# EAGLE board FED_detector_motor (EAGLE 5.11)
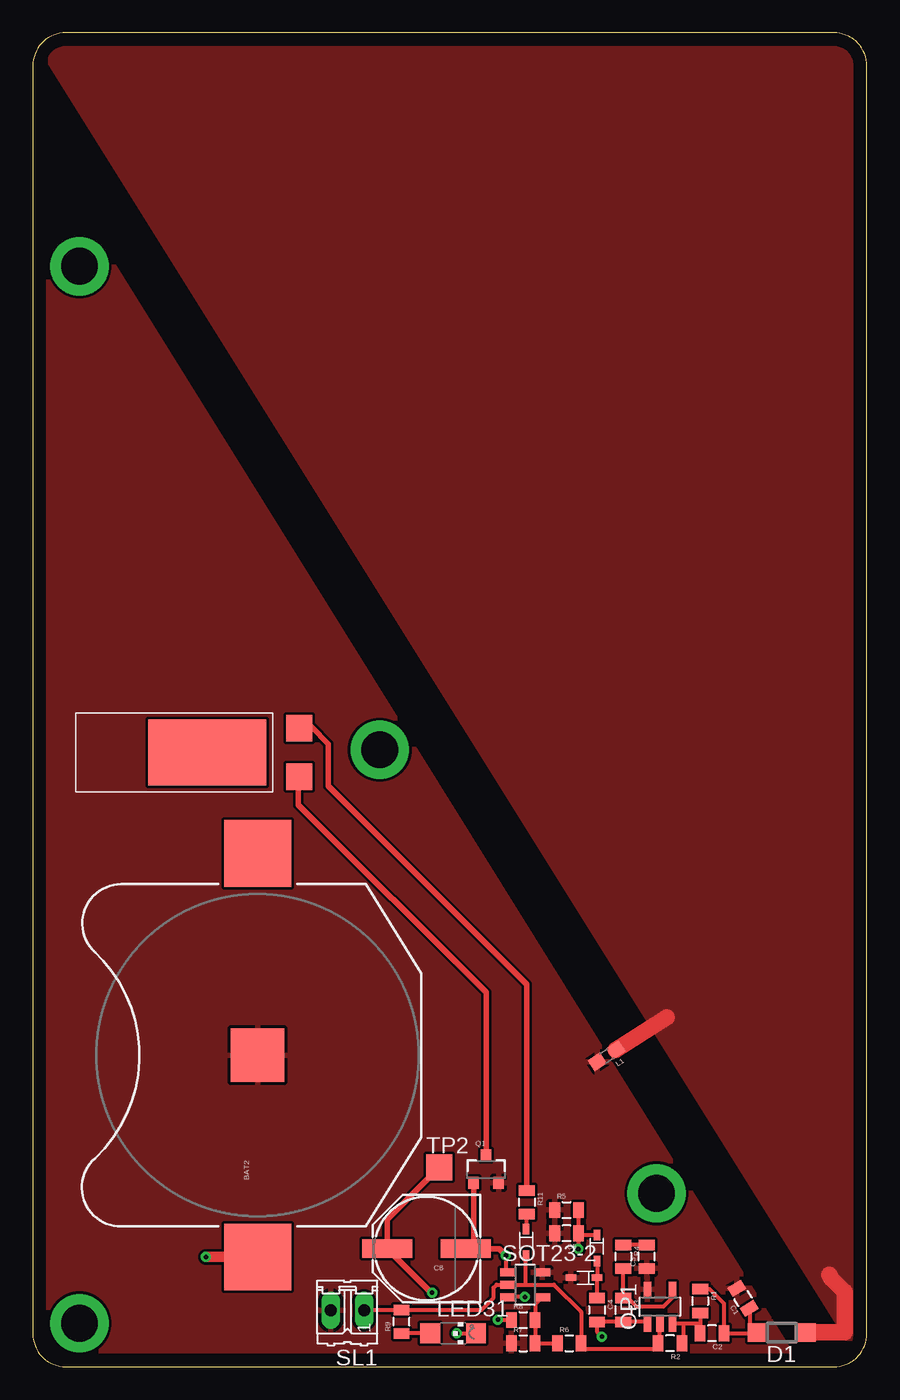
[diagram p0: board, top side]
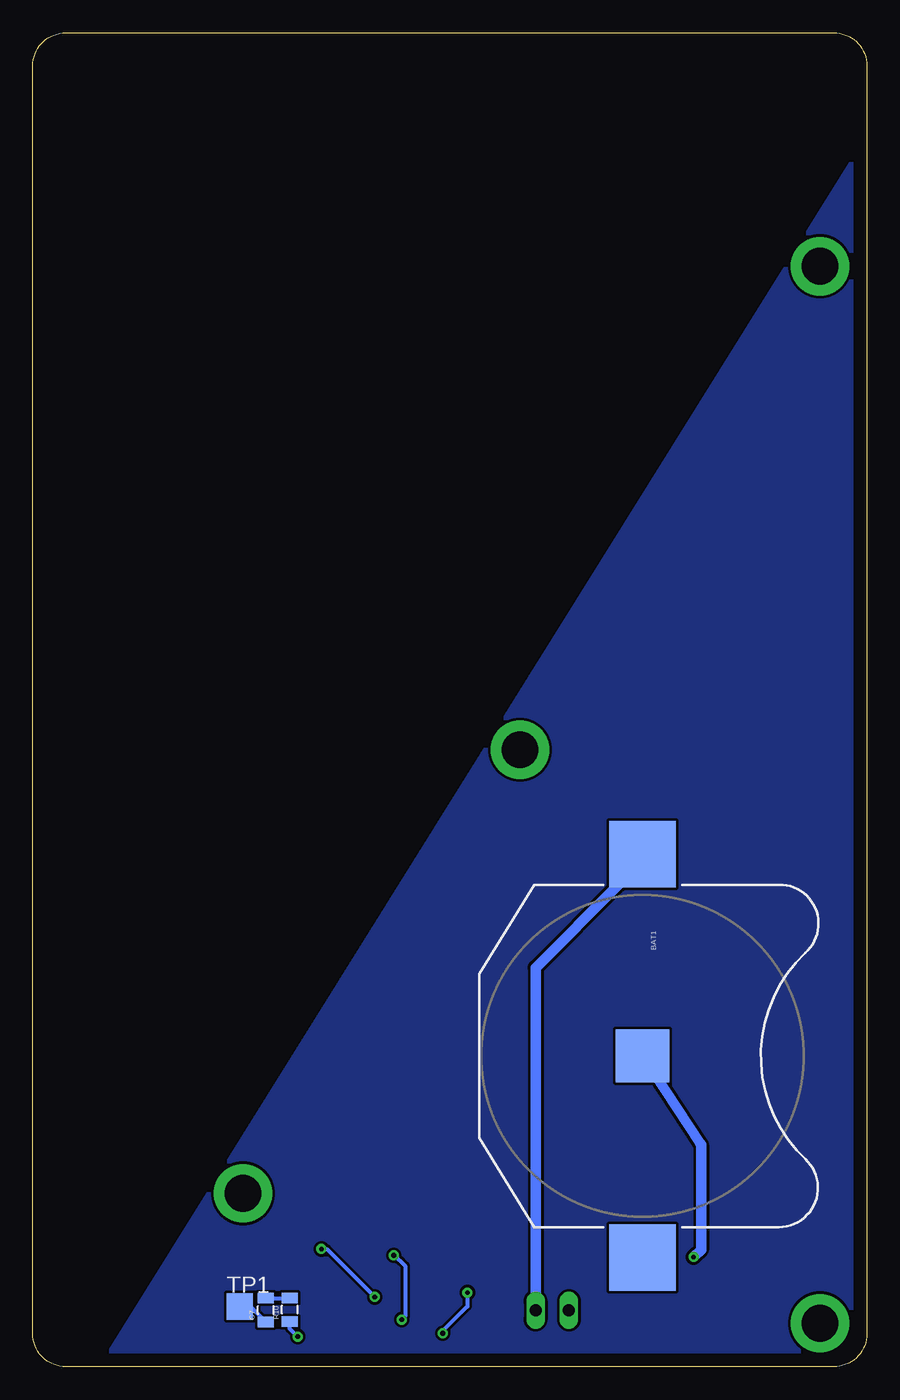
[diagram p1: board, bottom side, seen from below]

Size 63.5 x 101.6 mm. Coordinates in mm from the lower left corner, seen from the top.
Outline: 0,2.5 arc90 2.5,0 61,0 arc90 63.5,2.5 63.5,99.1 arc90 61,101.6 2.5,101.6 arc90 0,99.1 0,2.5
Copper layers (1*16): Top 0.035mm / dielectric 1.5mm / Bottom 0.035mm
Design rules "default": minimum track width 10mil, minimum drill 24mil, track to track 8mil, track to pad 8mil, pad to pad 8mil, via to via 8mil, smd to smd 8mil, copper to edge 40mil, drill to drill 8mil, minimum pad ring 10mil, minimum via ring 8mil, stop-mask expansion 4mil, vias tented up to drill 0mil, thermal gap 10mil

## Footprints (pad centres in the part's own frame; a part is rotated, then mirrored left to right if it is on the bottom)
BATTCON_245MM = smd 5.08 x 5.08: 1 -15.367,0; 3 15.367,0 | smd 4.064 x 4.064: 2 0,0
0805 = smd 0.8 x 1.2: 1 -0.9,0; 2 0.9,0
PANASONIC_E = smd 3.8 x 1.4: + 3,0; - -3,0
SOD123 = smd 1.4 x 1.4: A 1.9,0; C -1.9,0
SOD-523F = smd 0.5 x 0.8: 1 0,1; 2 0,-1
0603 = smd 1.1 x 1: 1 -0.85,0; 2 0.85,0
CHIPLED_1206 = smd 1.5 x 1.5: A 0,-1.75; C 0,1.75
SOT23-5 = smd 0.6 x 1.2: 1 -0.95,-1.306; 2 0,-1.306; 3 0.95,-1.306; 4 0.95,1.306; 5 -0.95,1.306
SOT23-3 = smd 0.8 x 0.9: 1 -0.95,-1; 2 0.95,-1; 3 0,1.1
02P = drill 0.914 long: 1 -1.27,0; 2 1.27,0
TP20SQ = smd 2 x 2: TP 0,0
5X10MM_VIB_MOTOR = smd 2 x 2: P$1 1.85,-7; P$2 -1.85,-7 | smd 5 x 9: P$3 0,0

## Placement (x,y rotation side)
BAT1  [BATTCON_245MM]  17.07,23.67 270 bottom
BAT2  [BATTCON_245MM]  17.12,23.72 90 top
C1  100pF  [0805]  54.08,5.21 122 top
C2  0.1uF  [0805]  51.71,2.54 180 top
C3  1uF  [0805]  46.74,8.38 90 top
C4  .47uF  [0805]  42.95,4.32 270 top
C5  .47uF  [0805]  40.64,10.16 180 top
C7  1uF  [0805]  45.77,4.32 90 bottom
C8  [PANASONIC_E]  29.97,8.99 180 top
D1  SD101BW-V-GS08  [SOD123]  57.02,2.62 180 top
D2  1N914BWT  [SOD-523F]  41.96,6.78 270 top
D3  1N914BWT  [SOD-523F]  42.95,9.04 0 top
D4  1N914BWT  [SOD-523F]  37.57,9.47 0 top
L1  0.1uh LK1608R10K-T  [0603]  43.69,23.67 213 top
LED31  [CHIPLED_1206]  32,2.54 270 top
OP1  TLV2711  [SOT23-5]  47.75,4.57 0 top
Q1  2N7002,215  [SOT23-3]  34.52,15.01 0 top
R1  1M  [0805]  50.83,5 270 top
R2  2.7M  [0805]  48.51,1.78 180 top
R3  2.7M  [0805]  44.96,4.32 270 top
R4  3.9k  [0805]  44.96,8.38 270 top
R5  10M  [0805]  40.64,11.94 0 top
R6  10M  [0805]  40.84,1.78 0 top
R7  47k  [0805]  37.34,1.78 0 top
R8  2.7M  [0805]  37.34,3.56 0 top
R9  1k  [0805]  28.07,3.43 90 top
R10  4.7k  [0805]  43.94,4.34 90 bottom
R11  1k  [0805]  37.62,12.52 270 top
SL1  [02P]  23.95,4.29 180 top
SOT23-2  TLV2711  [SOT23-5]  37.49,6.25 270 top
TP1  TPSQTP20SQ  [TP20SQ]  47.75,4.57 0 bottom
TP2  TPSQTP20SQ  [TP20SQ]  30.94,15.19 0 top
U$1  MOTOR5_10MM_VIBE  [5X10MM_VIB_MOTOR]  13.28,46.79 90 top

## Library data of the parts
BAT1 BAT2 C1-C5 C7 C8 L1 Q1 R1-R11 = SparkFun
D1 = diode
D2-D4 LED31 OP1 SOT23-2 = FED_detector
SL1 = PWM; OC_FARNELL: unknown; OC_NEWARK: unknown
TP1 TP2 = testpad
U$1 = FED_detector_motor

## Nets
ANT: D1.C L1.1
GND: BAT2.2 C1.2 C3.1 C5.2 D2.2 L1.2 OP1.5 Q1.2 R5.1 R7.1 SL1.2 SOT23-2.5
MOTOR-: Q1.3 U$1.P$2
N$1: C1.1 C2.1 D1.A R1.1
N$2: C4.1 D2.1 D3.2
N$3: LED31.A R9.1
N$4: C2.2 OP1.3 R1.2 R2.1
N$5: C5.1 D3.1 R5.2 SOT23-2.3
N$6: C7.2 R10.2
N$7: OP1.4 R3.1 R4.2
N$8: C4.2 OP1.1 R3.2 R10.1
N$9: C3.2 R4.1
N$10: R6.1 R7.2 R8.2 SOT23-2.4
N$11: C7.1 TP1.TP
N$13: C8.- Q1.1 R8.1 SOT23-2.1
N$14: C8.+ LED31.C TP2.TP
N$19: R11.1 U$1.P$1
N$20: BAT1.2 BAT2.1
N$22: D4.1 R11.2
VCC: BAT1.1 D4.2 OP1.2 R2.2 R6.2 R9.2 SL1.1 SOT23-2.2

## Tracks (layer width: path | path; a pad name or v marks a point on that pad's centre or on a via)
ANT
  Top 1.27: 48.28,26.59 L1.1 | 60.63,7.01 60.81,6.73 60.83,6.71 61.82,5.71 61.82,2.9 61.82,2.62 D1.C
  pour Top: 63.5,0 63.5,101.6 0,101.6
GND
  pour Top: 0,0 58.47,-0.2 0.64,92.71
MOTOR-
  Top 0.406: Q1.3 34.52,28.5 20.22,42.8 20.22,44.87 U$1.P$2
N$1
  Top 0.305: C2.1 52.63,2.54 | C1.1 54.62,4.38 54.62,2.49 D1.A 54.78,2.54 C2.1 | R1.1 50.84,5.92 51.51,5.92 52.61,4.81 C2.1
N$2
  Top 0.305: C4.1 D2.1 D3.2
N$3
  Top 0.305: R9.1 LED31.A
N$4
  Top 0.305: R1.2 C2.2 50.81,3.27 49.53,3.27 | 49.53,3.27 OP1.3 | R2.1 49.53,1.78 49.53,3.27
N$5  (via drill 0.36)
  Top 0.305: R5.2 C5.1 | C5.1 41.66,10.04 D3.1 | SOT23-2.3 36.2,5.31 v37.47,5.31 | v41.53,8.97 v41.54,8.98 C5.1
  Bottom 0.305: v37.47,5.31 41.12,8.97 v41.53,8.97
N$6
  Bottom 0.305: R10.2 43.97,5.22 C7.2
N$7
  Top 0.305: OP1.4 48.77,5.81 48.77,5.33 48.01,4.57 45.97,4.57 45.33,5.22 R3.1 R4.2
N$8  (via drill 0.36)
  Top 0.305: OP1.1 46.65,3.42 R3.2 C4.2 42.95,2.67 v43.33,2.29
  Bottom 0.305: v43.33,2.29 43.94,2.9 R10.1
N$9
  Top 0.305: C3.2 R4.1
N$10
  Top 0.305: R6.1 R7.2 R8.2 38.24,4.74 SOT23-2.4
N$11
  Bottom 0.305: C7.1 46.92,4.57 TP1.TP
N$12
  pour Bottom: 0.05,0 58.34,-0.03 0.03,93.47
N$13  (via drill 0.36)
  Top 0.305: 36.1,7.11 SOT23-2.1 36.02,7.37 v36.02,8.48 | R8.1 36.41,3.58 v35.41,3.58
  Top 0.406: 33.66,8.99 35.51,8.99 v36.02,8.48 | 33.66,8.99 C8.- | Q1.1 33.57,9.08 33.66,8.99
  Bottom 0.305: v35.41,3.58 35.15,3.83 35.15,7.7 35.46,8 v36.02,8.48
N$14  (via drill 0.36)
  Top 0.305: v32.28,2.54 LED31.C | v30.4,5.64
  Top 0.406: TP2.TP 26.97,11.22 C8.+ 30.32,5.64 v30.4,5.64
  Bottom 0.305: v30.4,5.64 30.4,4.6 32.28,2.72 v32.28,2.54
N$15  (via drill 2.79 pad 4.45)
  other vias: 3.56,83.82
N$16  (via drill 2.79 pad 4.45)
  other vias: 3.56,3.3
N$17  (via drill 2.79 pad 4.45)
  other vias: 47.5,13.21
N$18  (via drill 2.79 pad 4.45)
  other vias: 26.42,46.99
N$19
  Top 0.406: R11.1 37.62,29.13 22.5,44.25 22.5,47.45 21.23,48.72 20.36,48.72 U$1.P$1
N$20  (via drill 0.36)
  Top 0.813: 15.14,8.36 BAT2.1 v13.18,8.36
  Bottom 0.813: BAT1.2 12.7,16.99 12.62,16.92 12.62,8.91 v13.18,8.36
N$22
  Top 0.305: D4.1 37.62,10.47 R11.2
VCC
  Top 0.305: OP1.2 47.75,1.92 R2.2 47.61,1.35 41.91,1.35 41.91,1.78 R6.2 41.74,4.18 39.67,6.25 37.57,6.25 37.54,6.25 | 37.54,6.25 SOT23-2.2 35.31,6.25 35.08,6.02 35.08,5.26 34.16,4.34 28.08,4.34 R9.2 25.26,4.33 SL1.1 | D4.2 37.54,8.47 37.54,6.25
  Bottom 0.813: SL1.1 25.22,30.38 18.87,36.73 BAT1.1